# EAGLE board MicroMod_STM32_Processor-Panel (EAGLE 9.6.2), part 1 of 6
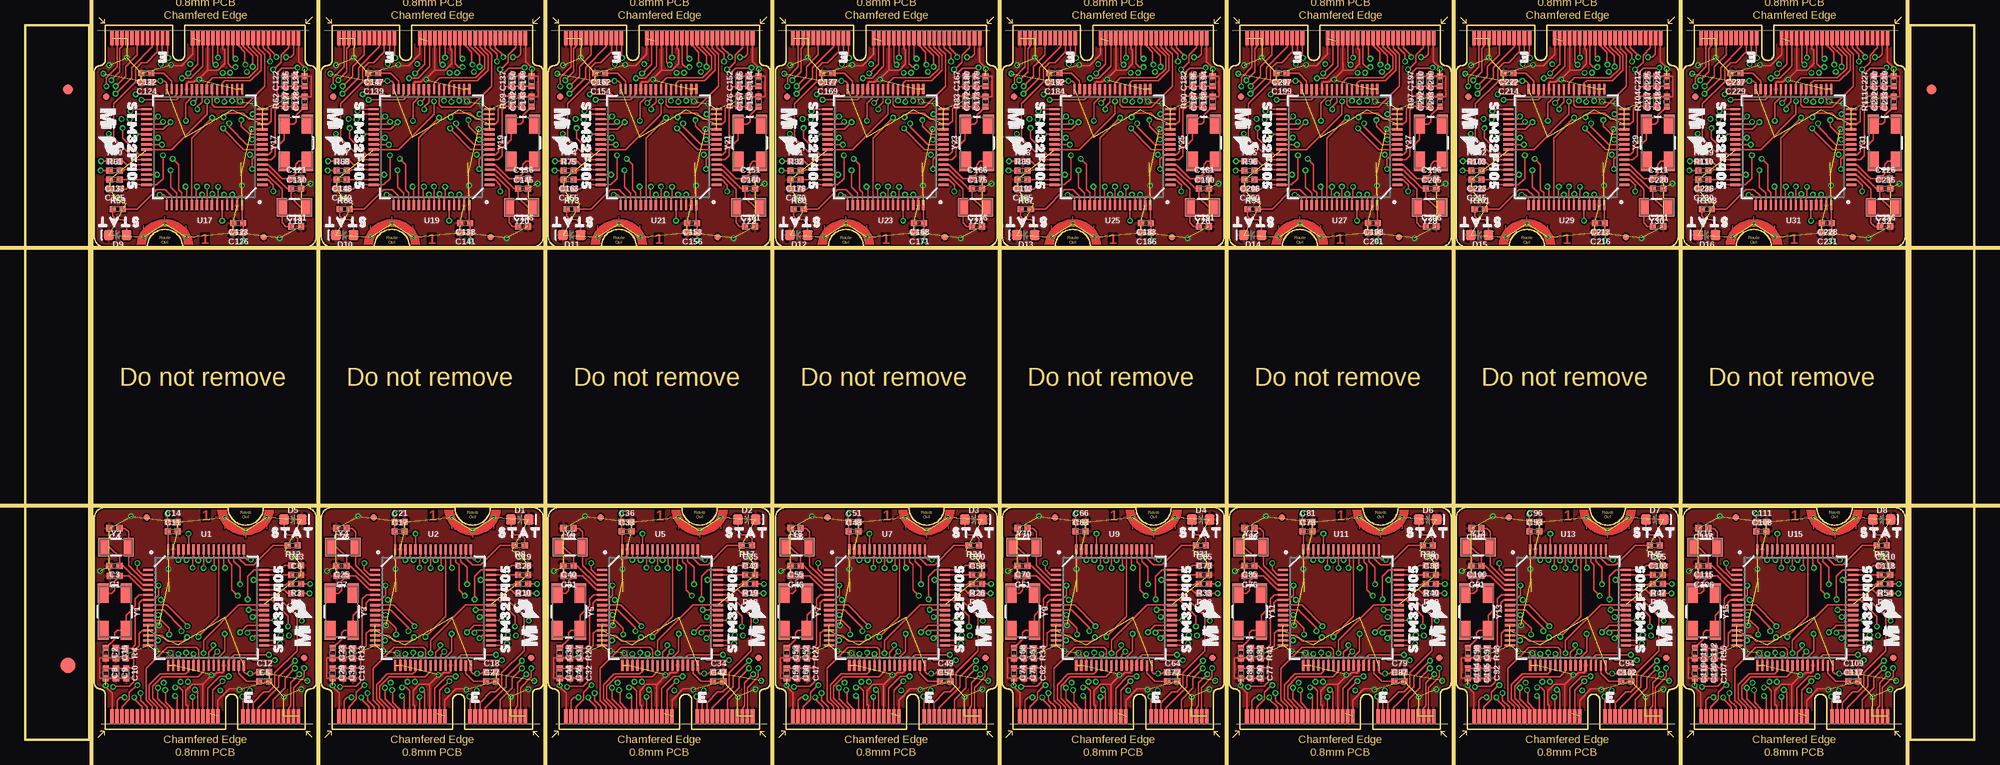
[diagram p0: board, top side]
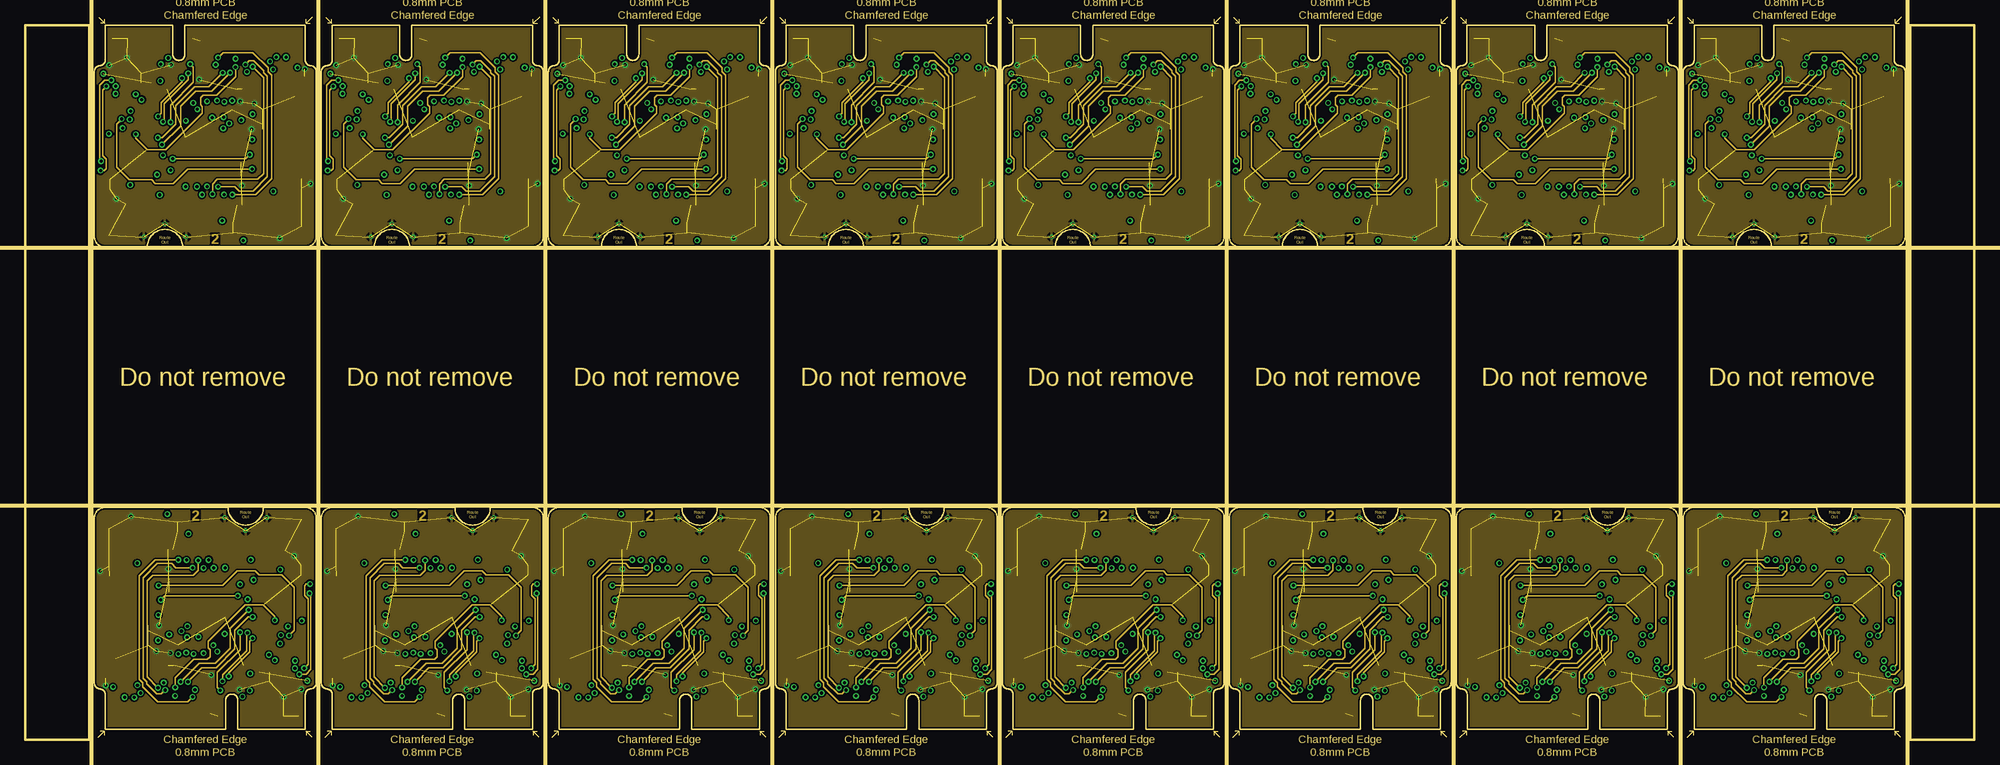
[diagram p1: board, inner layer Route2]
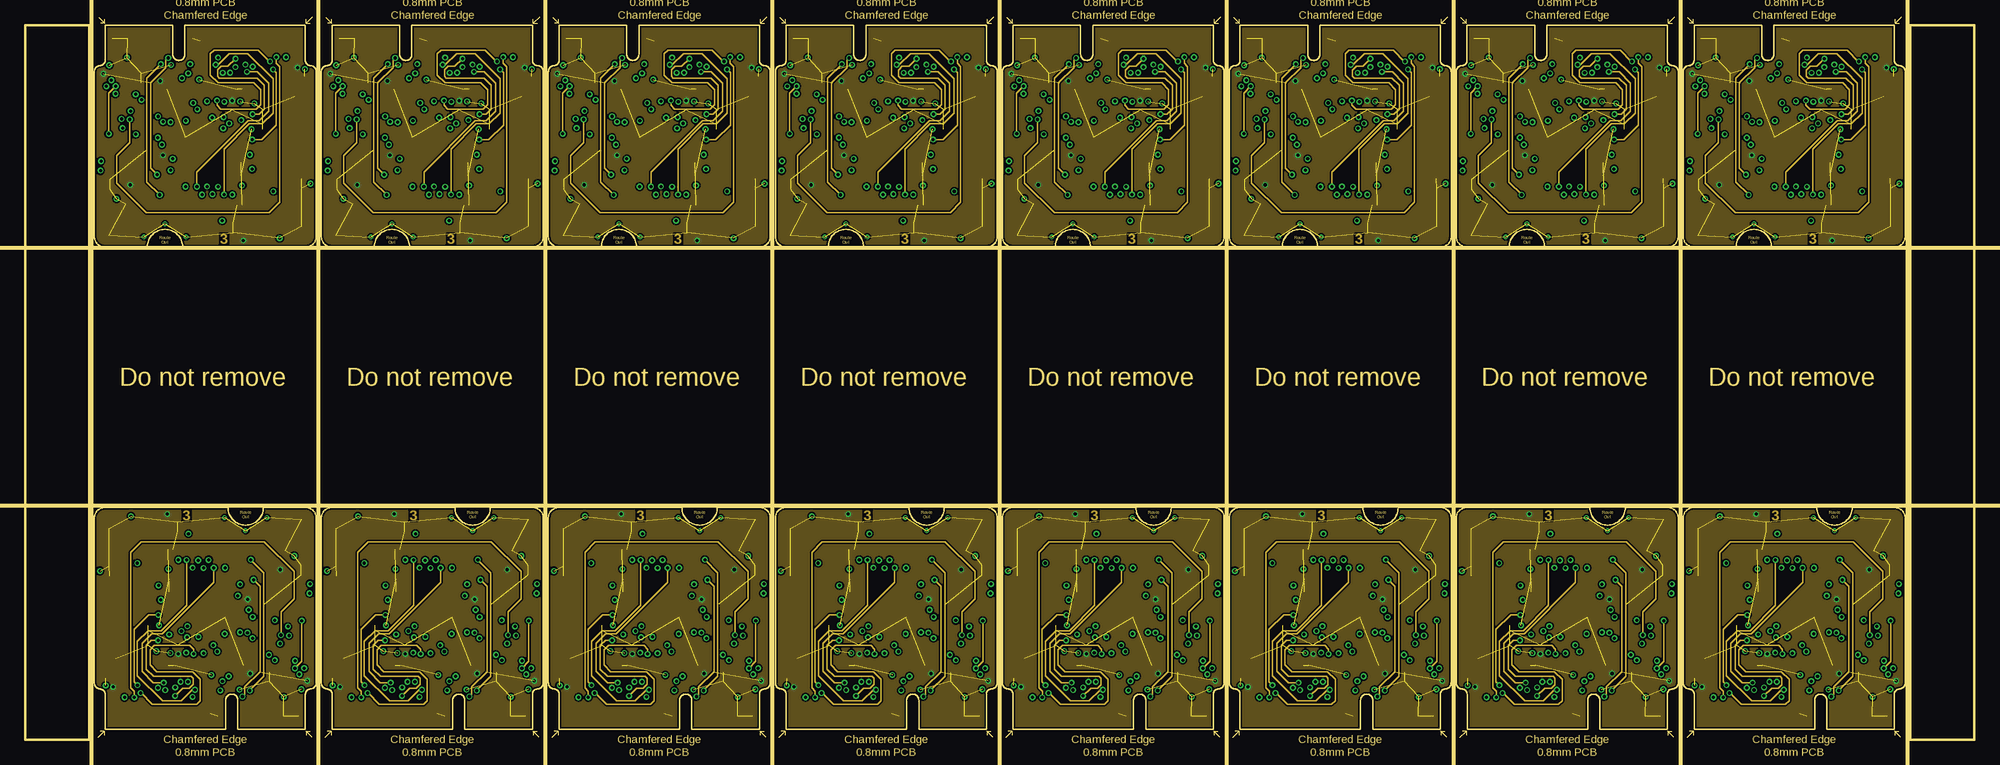
[diagram p2: board, inner layer Route15]
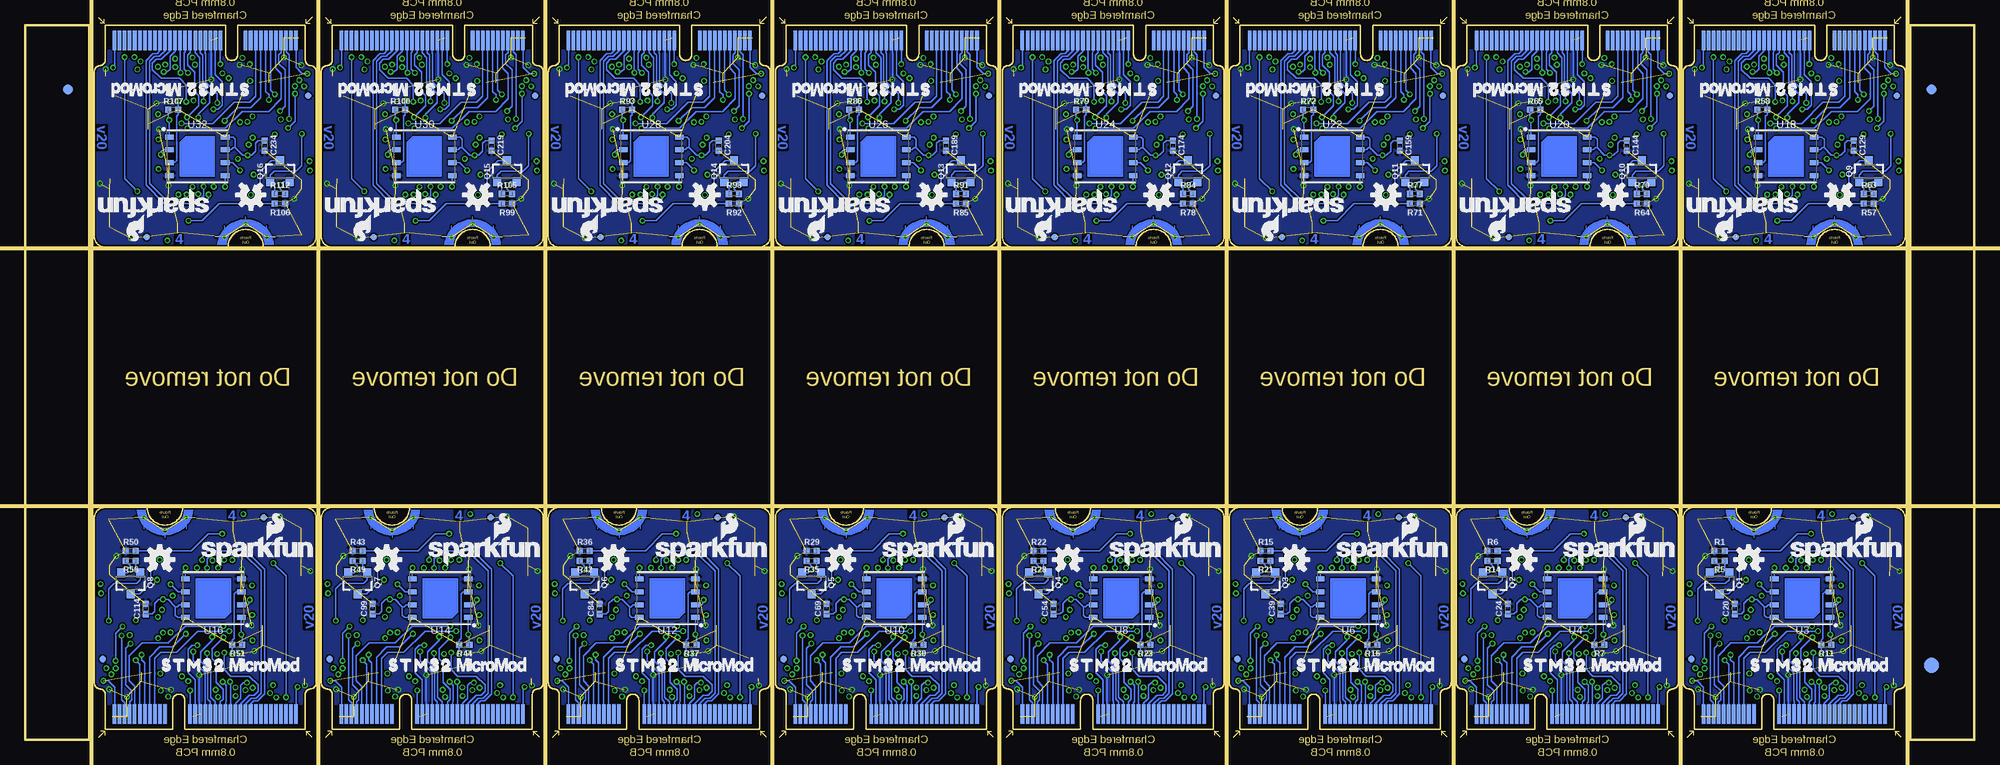
[diagram p3: board, bottom side, seen from below]

Size 193.27 x 70.87 mm. Coordinates in mm from the lower left corner, seen from the top.
Outline: 312 segments
Copper layers (1*2*15*16): Top 0.035559375mm / dielectric 0.47751875mm / Route2 0.035559375mm / dielectric 0.47751875mm / Route15 0.035559375mm / dielectric 0.47751875mm / Bottom 0.035559375mm
Design rules "MicroMod_STM32_Processor": minimum track width 4mil, minimum drill 6mil, track to track 5mil, track to pad 5mil, pad to pad 5mil, via to via 5mil, smd to smd 5mil, copper to edge 4mil, drill to drill 4mil, minimum pad ring 5mil, minimum via ring 5mil, stop-mask expansion 4mil, vias tented up to drill 25mil, thermal gap 10mil
tRestrict: area 11.4,11.3 to 11.6,11.5; area 13.9,7.3 to 14,7.4; area 13.8,8.1 to 13.9,8.5; area 33.9,11.3 to 34.1,11.5; area 36.4,7.3 to 36.5,7.4; area 36.3,8.1 to 36.4,8.5; area 56.4,11.3 to 56.6,11.5; area 58.9,7.3 to 59,7.4; area 58.8,8.1 to 58.9,8.5; area 78.9,11.3 to 79.1,11.5; area 81.4,7.3 to 81.5,7.4; area 81.3,8.1 to 81.4,8.5; 36 more areas
Milling: 11 lines

## Footprints (pad centres in the part's own frame; a part is rotated, then mirrored left to right if it is on the bottom)
0402-TIGHT = smd 0.6 x 0.6: 1 -0.5,0; 2 0.5,0
LED-0603 = smd 1 x 1: A -0.877,0; C 0.877,0
FIDUCIAL-1X2 = smd 1 x 1: 1 0,0
FIDUCIAL-1.5X3 = smd 1.5 x 1.5: 1 0,0
FIDUCIAL-MICRO = smd 0.635 x 0.635: 1 0,0
M.2-CARD-E-22 = smd 0.35 x 1.45: 1 9.25,1.275; 3 8.75,1.275; 5 8.25,1.275; 7 7.75,1.275; 9 7.25,1.275; 11 6.75,1.275; 13 6.25,1.275; 15 5.75,1.275; 17 5.25,1.275; 19 4.75,1.275; 21 4.25,1.275; 23 3.75,1.275; 33 1.25,1.275; 35 0.75,1.275; 37 0.25,1.275; 39 -0.25,1.275; 41 -0.75,1.275; 43 -1.25,1.275; 45 -1.75,1.275; 47 -2.25,1.275; 49 -2.75,1.275; 51 -3.25,1.275; 53 -3.75,1.275; 55 -4.25,1.275; 57 -4.75,1.275; 59 -5.25,1.275; 61 -5.75,1.275; 63 -6.25,1.275; 65 -6.75,1.275; 67 -7.25,1.275; 69 -7.75,1.275; 71 -8.25,1.275; 73 -8.75,1.275; 75 -9.25,1.275 | smd 0.35 x 1.95 bottom: 2 9,1.525; 4 8.5,1.525; 6 8,1.525; 8 7.5,1.525; 10 7,1.525; 12 6.5,1.525; 14 6,1.525; 16 5.5,1.525; 18 5,1.525; 20 4.5,1.525; 22 4,1.525; 32 1.5,1.525; 34 1,1.525; 36 0.5,1.525; 38 0,1.525; 40 -0.5,1.525; 42 -1,1.525; 44 -1.5,1.525; 46 -2,1.525; 48 -2.5,1.525; 50 -3,1.525; 52 -3.5,1.525; 54 -4,1.525; 56 -4.5,1.525; 58 -5,1.525; 60 -5.5,1.525; 62 -6,1.525; 64 -6.5,1.525; 66 -7,1.525; 68 -7.5,1.525; 70 -8,1.525; 72 -8.5,1.525; 74 -9,1.525 | drill 0.2: GND1 1.9,21; GND2 4,19.7; GND3 6.1,21
SOT23-3 = smd 0.8 x 0.9: 1 -0.95,-1; 2 0.95,-1; 3 0,1.1
TQFP64 = smd 0.22 x 1: 1 -3.75,-5.75; 2 -3.25,-5.75; 3 -2.75,-5.75; 4 -2.25,-5.75; 5 -1.75,-5.75; 6 -1.25,-5.75; 7 -0.75,-5.75; 8 -0.25,-5.75; 9 0.25,-5.75; 10 0.75,-5.75; 11 1.25,-5.75; 12 1.75,-5.75; 13 2.25,-5.75; 14 2.75,-5.75; 15 3.25,-5.75; 16 3.75,-5.75; 33 3.75,5.75; 34 3.25,5.75; 35 2.75,5.75; 36 2.25,5.75; 37 1.75,5.75; 38 1.25,5.75; 39 0.75,5.75; 40 0.25,5.75; 41 -0.25,5.75; 42 -0.75,5.75; 43 -1.25,5.75; 44 -1.75,5.75; 45 -2.25,5.75; 46 -2.75,5.75; 47 -3.25,5.75; 48 -3.75,5.75 | smd 1 x 0.22: 17 5.75,-3.75; 18 5.75,-3.25; 19 5.75,-2.75; 20 5.75,-2.25; 21 5.75,-1.75; 22 5.75,-1.25; 23 5.75,-0.75; 24 5.75,-0.25; 25 5.75,0.25; 26 5.75,0.75; 27 5.75,1.25; 28 5.75,1.75; 29 5.75,2.25; 30 5.75,2.75; 31 5.75,3.25; 32 5.75,3.75; 49 -5.75,3.75; 50 -5.75,3.25; 51 -5.75,2.75; 52 -5.75,2.25; 53 -5.75,1.75; 54 -5.75,1.25; 55 -5.75,0.75; 56 -5.75,0.25; 57 -5.75,-0.25; 58 -5.75,-0.75; 59 -5.75,-1.25; 60 -5.75,-1.75; 61 -5.75,-2.25; 62 -5.75,-2.75; 63 -5.75,-3.25; 64 -5.75,-3.75
WSON-8-6X5 = smd 0.85 x 0.5: 1 -2.775,1.905; 2 -2.775,0.635; 3 -2.775,-0.635; 4 -2.775,-1.905; 5 2.775,-1.905; 6 2.775,-0.635; 7 2.775,0.635; 8 2.775,1.905
CRYSTAL-SMD-5X3.2-4PAD = smd 1.9 x 1.1: 1 -1.85,-1.15; 2 1.85,-1.15; 3 1.85,1.15; 4 -1.85,1.15
CRYSTAL-SMD-3.2X1.5MM = smd 1 x 1.8: P$1 -1.25,0; P$2 1.25,0

## Placement (x,y rotation side)
C1  22pF  [0402-TIGHT]  8.86,16.24 180 top
C2  22pF  [0402-TIGHT]  8,8.59 270 top
C3  15pF  [0402-TIGHT]  8.85,17.25 180 top
C4  15pF  [0402-TIGHT]  8.85,20.97 180 top
C5  2.2uF  [0402-TIGHT]  23.71,5.79 0 top
C6  2.2uF  [0402-TIGHT]  26.86,16.35 0 top
C7  22pF  [0402-TIGHT]  31.36,16.24 180 top
C8  0.1uF  [0402-TIGHT]  8,6.58 270 top
C9  1.0uF  [0402-TIGHT]  9,6.58 270 top
C10  4.7uF  [0402-TIGHT]  10,6.57 270 top
C11  0.1uF  [0402-TIGHT]  14.61,20.67 0 top
C12  0.1uF  [0402-TIGHT]  23.71,6.7 0 top
C13  0.1uF  [0402-TIGHT]  26.86,17.27 0 top
C14  0.1uF  [0402-TIGHT]  14.61,21.61 0 top
C15  0.1uF  [0402-TIGHT]  9,8.58 270 top
C16  4.7uF  [0402-TIGHT]  32.5,6.57 270 top
C17  0.1uF  [0402-TIGHT]  37.11,20.67 0 top
C18  0.1uF  [0402-TIGHT]  46.21,6.7 0 top
C19  0.1uF  [0402-TIGHT]  49.36,17.27 0 top
C20  0.1uF  [0402-TIGHT]  23.76,12.95 90 bottom
C21  0.1uF  [0402-TIGHT]  37.11,21.61 0 top
C22  0.1uF  [0402-TIGHT]  31.5,8.58 270 top
C23  22pF  [0402-TIGHT]  30.5,8.59 270 top
C24  0.1uF  [0402-TIGHT]  46.27,12.95 90 bottom
C25  15pF  [0402-TIGHT]  31.35,17.25 180 top
C26  15pF  [0402-TIGHT]  31.35,20.97 180 top
C27  2.2uF  [0402-TIGHT]  46.21,5.79 0 top
C28  2.2uF  [0402-TIGHT]  49.36,16.35 0 top
C29  0.1uF  [0402-TIGHT]  30.5,6.58 270 top
C30  1.0uF  [0402-TIGHT]  31.5,6.58 270 top
C31  22pF  [0402-TIGHT]  53.87,16.24 180 top
C32  4.7uF  [0402-TIGHT]  55.01,6.57 270 top
C33  0.1uF  [0402-TIGHT]  59.62,20.67 0 top
C34  0.1uF  [0402-TIGHT]  68.72,6.7 0 top
C35  0.1uF  [0402-TIGHT]  71.87,17.27 0 top
C36  0.1uF  [0402-TIGHT]  59.62,21.61 0 top
C37  0.1uF  [0402-TIGHT]  54.01,8.58 270 top
C38  22pF  [0402-TIGHT]  53.01,8.59 270 top
C39  0.1uF  [0402-TIGHT]  68.78,12.95 90 bottom
C40  15pF  [0402-TIGHT]  53.86,17.25 180 top
C41  15pF  [0402-TIGHT]  53.86,20.97 180 top
C42  2.2uF  [0402-TIGHT]  68.72,5.79 0 top
C43  2.2uF  [0402-TIGHT]  71.87,16.35 0 top
C44  0.1uF  [0402-TIGHT]  53.01,6.58 270 top
C45  1.0uF  [0402-TIGHT]  54.01,6.58 270 top
C46  22pF  [0402-TIGHT]  76.38,16.24 180 top
C47  4.7uF  [0402-TIGHT]  77.52,6.57 270 top
C48  0.1uF  [0402-TIGHT]  82.13,20.67 0 top
C49  0.1uF  [0402-TIGHT]  91.23,6.7 0 top
C50  0.1uF  [0402-TIGHT]  94.38,17.27 0 top
C51  0.1uF  [0402-TIGHT]  82.13,21.61 0 top
C52  0.1uF  [0402-TIGHT]  76.52,8.58 270 top
C53  22pF  [0402-TIGHT]  75.52,8.59 270 top
C54  0.1uF  [0402-TIGHT]  91.29,12.95 90 bottom
C55  15pF  [0402-TIGHT]  76.37,17.25 180 top
C56  15pF  [0402-TIGHT]  76.37,20.97 180 top
C57  2.2uF  [0402-TIGHT]  91.23,5.79 0 top
C58  2.2uF  [0402-TIGHT]  94.38,16.35 0 top
C59  0.1uF  [0402-TIGHT]  75.52,6.58 270 top
C60  1.0uF  [0402-TIGHT]  76.52,6.58 270 top
C61  22pF  [0402-TIGHT]  98.89,16.24 180 top
C62  4.7uF  [0402-TIGHT]  100.03,6.57 270 top
C63  0.1uF  [0402-TIGHT]  104.64,20.67 0 top
C64  0.1uF  [0402-TIGHT]  113.74,6.7 0 top
C65  0.1uF  [0402-TIGHT]  116.89,17.27 0 top
C66  0.1uF  [0402-TIGHT]  104.64,21.61 0 top
C67  0.1uF  [0402-TIGHT]  99.03,8.58 270 top
C68  22pF  [0402-TIGHT]  98.03,8.59 270 top
C69  0.1uF  [0402-TIGHT]  113.8,12.95 90 bottom
C70  15pF  [0402-TIGHT]  98.88,17.25 180 top
C71  15pF  [0402-TIGHT]  98.88,20.97 180 top
C72  2.2uF  [0402-TIGHT]  113.74,5.79 0 top
C73  2.2uF  [0402-TIGHT]  116.89,16.35 0 top
C74  0.1uF  [0402-TIGHT]  98.03,6.58 270 top
C75  1.0uF  [0402-TIGHT]  99.03,6.58 270 top
C76  22pF  [0402-TIGHT]  121.4,16.24 180 top
C77  4.7uF  [0402-TIGHT]  122.54,6.57 270 top
C78  0.1uF  [0402-TIGHT]  127.15,20.67 0 top
C79  0.1uF  [0402-TIGHT]  136.25,6.7 0 top
C80  0.1uF  [0402-TIGHT]  139.4,17.27 0 top
C81  0.1uF  [0402-TIGHT]  127.15,21.61 0 top
C82  0.1uF  [0402-TIGHT]  121.54,8.58 270 top
C83  22pF  [0402-TIGHT]  120.54,8.59 270 top
C84  0.1uF  [0402-TIGHT]  136.3,12.95 90 bottom
C85  15pF  [0402-TIGHT]  121.39,17.25 180 top
C86  15pF  [0402-TIGHT]  121.39,20.97 180 top
C87  2.2uF  [0402-TIGHT]  136.25,5.79 0 top
C88  2.2uF  [0402-TIGHT]  139.4,16.35 0 top
C89  0.1uF  [0402-TIGHT]  120.54,6.58 270 top
C90  1.0uF  [0402-TIGHT]  121.54,6.58 270 top
C91  22pF  [0402-TIGHT]  143.91,16.24 180 top
C92  4.7uF  [0402-TIGHT]  145.05,6.57 270 top
C93  0.1uF  [0402-TIGHT]  149.66,20.67 0 top
C94  0.1uF  [0402-TIGHT]  158.76,6.7 0 top
C95  0.1uF  [0402-TIGHT]  161.91,17.27 0 top
C96  0.1uF  [0402-TIGHT]  149.66,21.61 0 top
C97  0.1uF  [0402-TIGHT]  144.05,8.58 270 top
C98  22pF  [0402-TIGHT]  143.05,8.59 270 top
C99  0.1uF  [0402-TIGHT]  158.81,12.95 90 bottom
C100  15pF  [0402-TIGHT]  143.9,17.25 180 top
C101  15pF  [0402-TIGHT]  143.9,20.97 180 top
C102  2.2uF  [0402-TIGHT]  158.76,5.79 0 top
C103  2.2uF  [0402-TIGHT]  161.91,16.35 0 top
C104  0.1uF  [0402-TIGHT]  143.05,6.58 270 top
C105  1.0uF  [0402-TIGHT]  144.05,6.58 270 top
C106  22pF  [0402-TIGHT]  166.41,16.24 180 top
C107  4.7uF  [0402-TIGHT]  167.55,6.57 270 top
C108  0.1uF  [0402-TIGHT]  172.16,20.67 0 top
C109  0.1uF  [0402-TIGHT]  181.26,6.7 0 top
C110  0.1uF  [0402-TIGHT]  184.41,17.27 0 top
C111  0.1uF  [0402-TIGHT]  172.16,21.61 0 top
C112  0.1uF  [0402-TIGHT]  166.55,8.58 270 top
C113  22pF  [0402-TIGHT]  165.55,8.59 270 top
C114  0.1uF  [0402-TIGHT]  181.32,12.95 90 bottom
C115  15pF  [0402-TIGHT]  166.4,17.25 180 top
C116  15pF  [0402-TIGHT]  166.4,20.97 180 top
C117  2.2uF  [0402-TIGHT]  181.26,5.79 0 top
C118  2.2uF  [0402-TIGHT]  184.41,16.35 0 top
C119  0.1uF  [0402-TIGHT]  165.55,6.58 270 top
C120  1.0uF  [0402-TIGHT]  166.55,6.58 270 top
C121  22pF  [0402-TIGHT]  26.86,55.65 0 top
C122  4.7uF  [0402-TIGHT]  25.72,65.32 90 top
C123  0.1uF  [0402-TIGHT]  21.11,51.22 180 top
C124  0.1uF  [0402-TIGHT]  12.01,65.19 180 top
C125  0.1uF  [0402-TIGHT]  8.86,54.62 180 top
C126  0.1uF  [0402-TIGHT]  21.11,50.28 180 top
C127  0.1uF  [0402-TIGHT]  26.72,63.31 90 top
C128  22pF  [0402-TIGHT]  27.72,63.3 90 top
C129  0.1uF  [0402-TIGHT]  11.95,58.93 270 bottom
C130  15pF  [0402-TIGHT]  26.87,54.64 0 top
C131  15pF  [0402-TIGHT]  26.87,50.91 0 top
C132  2.2uF  [0402-TIGHT]  12.01,66.1 180 top
C133  2.2uF  [0402-TIGHT]  8.86,55.54 180 top
C134  0.1uF  [0402-TIGHT]  27.72,65.31 90 top
C135  1.0uF  [0402-TIGHT]  26.72,65.31 90 top
C136  22pF  [0402-TIGHT]  49.37,55.65 0 top
C137  4.7uF  [0402-TIGHT]  48.23,65.32 90 top
C138  0.1uF  [0402-TIGHT]  43.62,51.22 180 top
C139  0.1uF  [0402-TIGHT]  34.52,65.19 180 top
C140  0.1uF  [0402-TIGHT]  31.37,54.62 180 top
C141  0.1uF  [0402-TIGHT]  43.62,50.28 180 top
C142  0.1uF  [0402-TIGHT]  49.23,63.31 90 top
C143  22pF  [0402-TIGHT]  50.23,63.3 90 top
C144  0.1uF  [0402-TIGHT]  34.46,58.93 270 bottom
C145  15pF  [0402-TIGHT]  49.38,54.64 0 top
C146  15pF  [0402-TIGHT]  49.38,50.91 0 top
C147  2.2uF  [0402-TIGHT]  34.52,66.1 180 top
C148  2.2uF  [0402-TIGHT]  31.37,55.54 180 top
C149  0.1uF  [0402-TIGHT]  50.23,65.31 90 top
C150  1.0uF  [0402-TIGHT]  49.23,65.31 90 top
C151  22pF  [0402-TIGHT]  71.87,55.65 0 top
C152  4.7uF  [0402-TIGHT]  70.73,65.32 90 top
C153  0.1uF  [0402-TIGHT]  66.12,51.22 180 top
C154  0.1uF  [0402-TIGHT]  57.02,65.19 180 top
C155  0.1uF  [0402-TIGHT]  53.87,54.62 180 top
C156  0.1uF  [0402-TIGHT]  66.12,50.28 180 top
C157  0.1uF  [0402-TIGHT]  71.73,63.31 90 top
C158  22pF  [0402-TIGHT]  72.73,63.3 90 top
C159  0.1uF  [0402-TIGHT]  56.97,58.93 270 bottom
C160  15pF  [0402-TIGHT]  71.88,54.64 0 top
C161  15pF  [0402-TIGHT]  71.88,50.91 0 top
C162  2.2uF  [0402-TIGHT]  57.02,66.1 180 top
C163  2.2uF  [0402-TIGHT]  53.87,55.54 180 top
C164  0.1uF  [0402-TIGHT]  72.73,65.31 90 top
C165  1.0uF  [0402-TIGHT]  71.73,65.31 90 top
C166  22pF  [0402-TIGHT]  94.38,55.65 0 top
C167  4.7uF  [0402-TIGHT]  93.24,65.32 90 top
C168  0.1uF  [0402-TIGHT]  88.63,51.22 180 top
C169  0.1uF  [0402-TIGHT]  79.53,65.19 180 top
C170  0.1uF  [0402-TIGHT]  76.38,54.62 180 top
C171  0.1uF  [0402-TIGHT]  88.63,50.28 180 top
C172  0.1uF  [0402-TIGHT]  94.24,63.31 90 top
C173  22pF  [0402-TIGHT]  95.24,63.3 90 top
C174  0.1uF  [0402-TIGHT]  79.48,58.93 270 bottom
C175  15pF  [0402-TIGHT]  94.39,54.64 0 top
C176  15pF  [0402-TIGHT]  94.39,50.91 0 top
C177  2.2uF  [0402-TIGHT]  79.53,66.1 180 top
C178  2.2uF  [0402-TIGHT]  76.38,55.54 180 top
C179  0.1uF  [0402-TIGHT]  95.24,65.31 90 top
C180  1.0uF  [0402-TIGHT]  94.24,65.31 90 top
C181  22pF  [0402-TIGHT]  116.89,55.65 0 top
C182  4.7uF  [0402-TIGHT]  115.75,65.32 90 top
C183  0.1uF  [0402-TIGHT]  111.14,51.22 180 top
C184  0.1uF  [0402-TIGHT]  102.04,65.19 180 top
C185  0.1uF  [0402-TIGHT]  98.89,54.62 180 top
C186  0.1uF  [0402-TIGHT]  111.14,50.28 180 top
C187  0.1uF  [0402-TIGHT]  116.75,63.31 90 top
C188  22pF  [0402-TIGHT]  117.75,63.3 90 top
C189  0.1uF  [0402-TIGHT]  101.98,58.93 270 bottom
C190  15pF  [0402-TIGHT]  116.9,54.64 0 top
C191  15pF  [0402-TIGHT]  116.9,50.91 0 top
C192  2.2uF  [0402-TIGHT]  102.04,66.1 180 top
C193  2.2uF  [0402-TIGHT]  98.89,55.54 180 top
C194  0.1uF  [0402-TIGHT]  117.75,65.31 90 top
C195  1.0uF  [0402-TIGHT]  116.75,65.31 90 top
C196  22pF  [0402-TIGHT]  139.4,55.65 0 top
C197  4.7uF  [0402-TIGHT]  138.26,65.32 90 top
C198  0.1uF  [0402-TIGHT]  133.65,51.22 180 top
C199  0.1uF  [0402-TIGHT]  124.55,65.19 180 top
C200  0.1uF  [0402-TIGHT]  121.4,54.62 180 top
C201  0.1uF  [0402-TIGHT]  133.65,50.28 180 top
C202  0.1uF  [0402-TIGHT]  139.26,63.31 90 top
C203  22pF  [0402-TIGHT]  140.26,63.3 90 top
C204  0.1uF  [0402-TIGHT]  124.49,58.93 270 bottom
C205  15pF  [0402-TIGHT]  139.41,54.64 0 top
C206  15pF  [0402-TIGHT]  139.41,50.91 0 top
C207  2.2uF  [0402-TIGHT]  124.55,66.1 180 top
C208  2.2uF  [0402-TIGHT]  121.4,55.54 180 top
C209  0.1uF  [0402-TIGHT]  140.26,65.31 90 top
C210  1.0uF  [0402-TIGHT]  139.26,65.31 90 top
C211  22pF  [0402-TIGHT]  161.91,55.65 0 top
C212  4.7uF  [0402-TIGHT]  160.77,65.32 90 top
C213  0.1uF  [0402-TIGHT]  156.16,51.22 180 top
C214  0.1uF  [0402-TIGHT]  147.06,65.19 180 top
C215  0.1uF  [0402-TIGHT]  143.91,54.62 180 top
C216  0.1uF  [0402-TIGHT]  156.16,50.28 180 top
C217  0.1uF  [0402-TIGHT]  161.77,63.31 90 top
C218  22pF  [0402-TIGHT]  162.77,63.3 90 top
C219  0.1uF  [0402-TIGHT]  147,58.93 270 bottom
C220  15pF  [0402-TIGHT]  161.92,54.64 0 top
C221  15pF  [0402-TIGHT]  161.92,50.91 0 top
C222  2.2uF  [0402-TIGHT]  147.06,66.1 180 top
C223  2.2uF  [0402-TIGHT]  143.91,55.54 180 top
C224  0.1uF  [0402-TIGHT]  162.77,65.31 90 top
C225  1.0uF  [0402-TIGHT]  161.77,65.31 90 top
C226  22pF  [0402-TIGHT]  184.41,55.65 0 top
C227  4.7uF  [0402-TIGHT]  183.27,65.32 90 top
C228  0.1uF  [0402-TIGHT]  178.66,51.22 180 top
C229  0.1uF  [0402-TIGHT]  169.56,65.19 180 top
C230  0.1uF  [0402-TIGHT]  166.41,54.62 180 top
C231  0.1uF  [0402-TIGHT]  178.66,50.28 180 top
C232  0.1uF  [0402-TIGHT]  184.27,63.31 90 top
C233  22pF  [0402-TIGHT]  185.27,63.3 90 top
C234  0.1uF  [0402-TIGHT]  169.51,58.93 270 bottom
C235  15pF  [0402-TIGHT]  184.42,54.64 0 top
C236  15pF  [0402-TIGHT]  184.42,50.91 0 top
C237  2.2uF  [0402-TIGHT]  169.56,66.1 180 top
C238  2.2uF  [0402-TIGHT]  166.41,55.54 180 top
C239  0.1uF  [0402-TIGHT]  185.27,65.31 90 top
C240  1.0uF  [0402-TIGHT]  184.27,65.31 90 top
D1  BLUE  [LED-0603]  49.04,21.83 0 top
D2  BLUE  [LED-0603]  71.55,21.83 0 top
D3  BLUE  [LED-0603]  94.06,21.83 0 top
D4  BLUE  [LED-0603]  116.57,21.83 0 top
D5  BLUE  [LED-0603]  26.54,21.83 0 top
D6  BLUE  [LED-0603]  139.08,21.83 0 top
D7  BLUE  [LED-0603]  161.59,21.83 0 top
D8  BLUE  [LED-0603]  184.09,21.83 0 top
D9  BLUE  [LED-0603]  9.18,50.06 180 top
D10  BLUE  [LED-0603]  31.69,50.06 180 top
D11  BLUE  [LED-0603]  54.19,50.06 180 top
D12  BLUE  [LED-0603]  76.7,50.06 180 top
D13  BLUE  [LED-0603]  99.21,50.06 180 top
D14  BLUE  [LED-0603]  121.72,50.06 180 top
D15  BLUE  [LED-0603]  144.23,50.06 180 top
D16  BLUE  [LED-0603]  166.73,50.06 180 top
E$1  [FIDUCIAL-1X2]  4.23,64.52 0 top
E$2  [FIDUCIAL-1X2]  4.23,64.52 0 bottom
E$3  [FIDUCIAL-1X2]  189.04,64.52 0 top
E$4  [FIDUCIAL-1X2]  189.04,64.52 0 bottom
E$5  [FIDUCIAL-1.5X3]  4.23,7.37 0 top
E$6  [FIDUCIAL-1.5X3]  4.23,7.37 0 bottom
FD1  FIDUCIALUFIDUCIAL  [FIDUCIAL-MICRO]  27.68,8.09 0 top
FD2  FIDUCIALUFIDUCIAL  [FIDUCIAL-MICRO]  12.06,22.06 0 bottom
FD3  FIDUCIALUFIDUCIAL  [FIDUCIAL-MICRO]  28.04,7.99 0 bottom
FD4  FIDUCIALUFIDUCIAL  [FIDUCIAL-MICRO]  12.06,22.06 0 top
FD5  FIDUCIALUFIDUCIAL  [FIDUCIAL-MICRO]  50.19,8.09 0 top
FD6  FIDUCIALUFIDUCIAL  [FIDUCIAL-MICRO]  34.56,22.06 0 bottom
FD7  FIDUCIALUFIDUCIAL  [FIDUCIAL-MICRO]  50.54,7.99 0 bottom
FD8  FIDUCIALUFIDUCIAL  [FIDUCIAL-MICRO]  34.56,22.06 0 top
FD9  FIDUCIALUFIDUCIAL  [FIDUCIAL-MICRO]  72.7,8.09 0 top
FD10  FIDUCIALUFIDUCIAL  [FIDUCIAL-MICRO]  57.07,22.06 0 bottom
FD11  FIDUCIALUFIDUCIAL  [FIDUCIAL-MICRO]  73.05,7.99 0 bottom
FD12  FIDUCIALUFIDUCIAL  [FIDUCIAL-MICRO]  57.07,22.06 0 top
FD13  FIDUCIALUFIDUCIAL  [FIDUCIAL-MICRO]  95.21,8.09 0 top
FD14  FIDUCIALUFIDUCIAL  [FIDUCIAL-MICRO]  79.58,22.06 0 bottom
FD15  FIDUCIALUFIDUCIAL  [FIDUCIAL-MICRO]  95.56,7.99 0 bottom
FD16  FIDUCIALUFIDUCIAL  [FIDUCIAL-MICRO]  79.58,22.06 0 top
FD17  FIDUCIALUFIDUCIAL  [FIDUCIAL-MICRO]  117.72,8.09 0 top
FD18  FIDUCIALUFIDUCIAL  [FIDUCIAL-MICRO]  102.09,22.06 0 bottom
FD19  FIDUCIALUFIDUCIAL  [FIDUCIAL-MICRO]  118.07,7.99 0 bottom
FD20  FIDUCIALUFIDUCIAL  [FIDUCIAL-MICRO]  102.09,22.06 0 top
FD21  FIDUCIALUFIDUCIAL  [FIDUCIAL-MICRO]  140.22,8.09 0 top
FD22  FIDUCIALUFIDUCIAL  [FIDUCIAL-MICRO]  124.6,22.06 0 bottom
FD23  FIDUCIALUFIDUCIAL  [FIDUCIAL-MICRO]  140.58,7.99 0 bottom
FD24  FIDUCIALUFIDUCIAL  [FIDUCIAL-MICRO]  124.6,22.06 0 top
FD25  FIDUCIALUFIDUCIAL  [FIDUCIAL-MICRO]  162.73,8.09 0 top
FD26  FIDUCIALUFIDUCIAL  [FIDUCIAL-MICRO]  147.11,22.06 0 bottom
FD27  FIDUCIALUFIDUCIAL  [FIDUCIAL-MICRO]  163.09,7.99 0 bottom
FD28  FIDUCIALUFIDUCIAL  [FIDUCIAL-MICRO]  147.11,22.06 0 top
FD29  FIDUCIALUFIDUCIAL  [FIDUCIAL-MICRO]  185.24,8.09 0 top
FD30  FIDUCIALUFIDUCIAL  [FIDUCIAL-MICRO]  169.61,22.06 0 bottom
FD31  FIDUCIALUFIDUCIAL  [FIDUCIAL-MICRO]  185.59,7.99 0 bottom
FD32  FIDUCIALUFIDUCIAL  [FIDUCIAL-MICRO]  169.61,22.06 0 top
FD33  FIDUCIALUFIDUCIAL  [FIDUCIAL-MICRO]  8.03,63.79 180 top
FD34  FIDUCIALUFIDUCIAL  [FIDUCIAL-MICRO]  23.66,49.83 180 bottom
FD35  FIDUCIALUFIDUCIAL  [FIDUCIAL-MICRO]  7.68,63.9 180 bottom
FD36  FIDUCIALUFIDUCIAL  [FIDUCIAL-MICRO]  23.66,49.83 180 top
FD37  FIDUCIALUFIDUCIAL  [FIDUCIAL-MICRO]  30.54,63.79 180 top
FD38  FIDUCIALUFIDUCIAL  [FIDUCIAL-MICRO]  46.17,49.83 180 bottom
FD39  FIDUCIALUFIDUCIAL  [FIDUCIAL-MICRO]  30.19,63.9 180 bottom
FD40  FIDUCIALUFIDUCIAL  [FIDUCIAL-MICRO]  46.17,49.83 180 top
FD41  FIDUCIALUFIDUCIAL  [FIDUCIAL-MICRO]  53.05,63.79 180 top
FD42  FIDUCIALUFIDUCIAL  [FIDUCIAL-MICRO]  68.67,49.83 180 bottom
FD43  FIDUCIALUFIDUCIAL  [FIDUCIAL-MICRO]  52.69,63.9 180 bottom
FD44  FIDUCIALUFIDUCIAL  [FIDUCIAL-MICRO]  68.67,49.83 180 top
FD45  FIDUCIALUFIDUCIAL  [FIDUCIAL-MICRO]  75.56,63.79 180 top
FD46  FIDUCIALUFIDUCIAL  [FIDUCIAL-MICRO]  91.18,49.83 180 bottom
FD47  FIDUCIALUFIDUCIAL  [FIDUCIAL-MICRO]  75.2,63.9 180 bottom
FD48  FIDUCIALUFIDUCIAL  [FIDUCIAL-MICRO]  91.18,49.83 180 top
FD49  FIDUCIALUFIDUCIAL  [FIDUCIAL-MICRO]  98.06,63.79 180 top
FD50  FIDUCIALUFIDUCIAL  [FIDUCIAL-MICRO]  113.69,49.83 180 bottom
FD51  FIDUCIALUFIDUCIAL  [FIDUCIAL-MICRO]  97.71,63.9 180 bottom
FD52  FIDUCIALUFIDUCIAL  [FIDUCIAL-MICRO]  113.69,49.83 180 top
FD53  FIDUCIALUFIDUCIAL  [FIDUCIAL-MICRO]  120.57,63.79 180 top
FD54  FIDUCIALUFIDUCIAL  [FIDUCIAL-MICRO]  136.2,49.83 180 bottom
FD55  FIDUCIALUFIDUCIAL  [FIDUCIAL-MICRO]  120.22,63.9 180 bottom
FD56  FIDUCIALUFIDUCIAL  [FIDUCIAL-MICRO]  136.2,49.83 180 top
FD57  FIDUCIALUFIDUCIAL  [FIDUCIAL-MICRO]  143.08,63.79 180 top
FD58  FIDUCIALUFIDUCIAL  [FIDUCIAL-MICRO]  158.71,49.83 180 bottom
FD59  FIDUCIALUFIDUCIAL  [FIDUCIAL-MICRO]  142.73,63.9 180 bottom
FD60  FIDUCIALUFIDUCIAL  [FIDUCIAL-MICRO]  158.71,49.83 180 top
FD61  FIDUCIALUFIDUCIAL  [FIDUCIAL-MICRO]  165.59,63.79 180 top
FD62  FIDUCIALUFIDUCIAL  [FIDUCIAL-MICRO]  181.21,49.83 180 bottom
FD63  FIDUCIALUFIDUCIAL  [FIDUCIAL-MICRO]  165.23,63.9 180 bottom
FD64  FIDUCIALUFIDUCIAL  [FIDUCIAL-MICRO]  181.21,49.83 180 top
J1  MICROMOD-2222  [M.2-CARD-E-22]  17.86,1.02 0 top
J2  MICROMOD-2222  [M.2-CARD-E-22]  40.36,1.02 0 top
J3  MICROMOD-2222  [M.2-CARD-E-22]  62.87,1.02 0 top
J4  MICROMOD-2222  [M.2-CARD-E-22]  85.38,1.02 0 top
J5  MICROMOD-2222  [M.2-CARD-E-22]  107.89,1.02 0 top
J6  MICROMOD-2222  [M.2-CARD-E-22]  130.4,1.02 0 top
J7  MICROMOD-2222  [M.2-CARD-E-22]  152.91,1.02 0 top
J8  MICROMOD-2222  [M.2-CARD-E-22]  175.41,1.02 0 top
J9  MICROMOD-2222  [M.2-CARD-E-22]  17.86,70.87 180 top
J10  MICROMOD-2222  [M.2-CARD-E-22]  40.37,70.87 180 top
J11  MICROMOD-2222  [M.2-CARD-E-22]  62.87,70.87 180 top
J12  MICROMOD-2222  [M.2-CARD-E-22]  85.38,70.87 180 top
J13  MICROMOD-2222  [M.2-CARD-E-22]  107.89,70.87 180 top
J14  MICROMOD-2222  [M.2-CARD-E-22]  130.4,70.87 180 top
J15  MICROMOD-2222  [M.2-CARD-E-22]  152.91,70.87 180 top
J16  MICROMOD-2222  [M.2-CARD-E-22]  175.41,70.87 180 top
LOGO1  OSHW-LOGOS  [OSHW-LOGO-S]  44.88,17.85 0 bottom
LOGO2  OSHW-LOGOS  [OSHW-LOGO-S]  22.38,17.85 0 bottom
LOGO3  SFE_LOGO_NAME_FLAME.1_INCH  [SFE_LOGO_NAME_FLAME_.1]  12.64,18.73 0 bottom
LOGO4  SFE_LOGO_NAME_FLAME.1_INCH  [SFE_LOGO_NAME_FLAME_.1]  35.14,18.73 0 bottom
LOGO5  OSHW-LOGOS  [OSHW-LOGO-S]  67.39,17.85 0 bottom
LOGO6  SFE_LOGO_NAME_FLAME.1_INCH  [SFE_LOGO_NAME_FLAME_.1]  57.65,18.73 0 bottom
LOGO7  OSHW-LOGOS  [OSHW-LOGO-S]  89.9,17.85 0 bottom
LOGO8  SFE_LOGO_NAME_FLAME.1_INCH  [SFE_LOGO_NAME_FLAME_.1]  80.16,18.73 0 bottom
LOGO9  OSHW-LOGOS  [OSHW-LOGO-S]  112.41,17.85 0 bottom
LOGO10  SFE_LOGO_NAME_FLAME.1_INCH  [SFE_LOGO_NAME_FLAME_.1]  102.67,18.73 0 bottom
LOGO11  OSHW-LOGOS  [OSHW-LOGO-S]  134.92,17.85 0 bottom
LOGO12  SFE_LOGO_NAME_FLAME.1_INCH  [SFE_LOGO_NAME_FLAME_.1]  125.18,18.73 0 bottom
LOGO13  OSHW-LOGOS  [OSHW-LOGO-S]  157.43,17.85 0 bottom
LOGO14  SFE_LOGO_NAME_FLAME.1_INCH  [SFE_LOGO_NAME_FLAME_.1]  147.69,18.73 0 bottom
LOGO15  OSHW-LOGOS  [OSHW-LOGO-S]  179.93,17.85 0 bottom
LOGO16  SFE_LOGO_NAME_FLAME.1_INCH  [SFE_LOGO_NAME_FLAME_.1]  170.19,18.73 0 bottom
LOGO17  OSHW-LOGOS  [OSHW-LOGO-S]  13.34,54.04 180 bottom
LOGO18  SFE_LOGO_NAME_FLAME.1_INCH  [SFE_LOGO_NAME_FLAME_.1]  23.08,53.16 180 bottom
LOGO19  OSHW-LOGOS  [OSHW-LOGO-S]  35.85,54.04 180 bottom
LOGO20  SFE_LOGO_NAME_FLAME.1_INCH  [SFE_LOGO_NAME_FLAME_.1]  45.59,53.16 180 bottom
LOGO21  OSHW-LOGOS  [OSHW-LOGO-S]  58.35,54.04 180 bottom
LOGO22  SFE_LOGO_NAME_FLAME.1_INCH  [SFE_LOGO_NAME_FLAME_.1]  68.09,53.16 180 bottom
LOGO23  OSHW-LOGOS  [OSHW-LOGO-S]  80.86,54.04 180 bottom
LOGO24  SFE_LOGO_NAME_FLAME.1_INCH  [SFE_LOGO_NAME_FLAME_.1]  90.6,53.16 180 bottom
LOGO25  OSHW-LOGOS  [OSHW-LOGO-S]  103.37,54.04 180 bottom
LOGO26  SFE_LOGO_NAME_FLAME.1_INCH  [SFE_LOGO_NAME_FLAME_.1]  113.11,53.16 180 bottom
LOGO27  OSHW-LOGOS  [OSHW-LOGO-S]  125.88,54.04 180 bottom
LOGO28  SFE_LOGO_NAME_FLAME.1_INCH  [SFE_LOGO_NAME_FLAME_.1]  135.62,53.16 180 bottom
LOGO29  OSHW-LOGOS  [OSHW-LOGO-S]  148.39,54.04 180 bottom
LOGO30  SFE_LOGO_NAME_FLAME.1_INCH  [SFE_LOGO_NAME_FLAME_.1]  158.13,53.16 180 bottom
LOGO31  OSHW-LOGOS  [OSHW-LOGO-S]  170.89,54.04 180 bottom
LOGO32  SFE_LOGO_NAME_FLAME.1_INCH  [SFE_LOGO_NAME_FLAME_.1]  180.63,53.16 180 bottom
Q1  [SOT23-3]  25.26,15.55 180 bottom
Q2  [SOT23-3]  47.76,15.55 180 bottom
Q3  [SOT23-3]  70.27,15.55 180 bottom
Q4  [SOT23-3]  92.78,15.55 180 bottom
Q5  [SOT23-3]  115.29,15.55 180 bottom
Q6  [SOT23-3]  137.8,15.55 180 bottom
Q7  [SOT23-3]  160.31,15.55 180 bottom
Q8  [SOT23-3]  182.81,15.55 180 bottom
Q9  [SOT23-3]  10.46,56.34 0 bottom
Q10  [SOT23-3]  32.97,56.34 0 bottom
Q11  [SOT23-3]  55.47,56.34 0 bottom
Q12  [SOT23-3]  77.98,56.34 0 bottom
Q13  [SOT23-3]  100.49,56.34 0 bottom
Q14  [SOT23-3]  123,56.34 0 bottom
Q15  [SOT23-3]  145.51,56.34 0 bottom
Q16  [SOT23-3]  168.01,56.34 0 bottom
R1  100k  [0402-TIGHT]  25.26,18.74 0 bottom
R2  22  [0402-TIGHT]  26.86,14.51 180 top
R3  22  [0402-TIGHT]  26.86,15.43 180 top
R4  5.1k  [0402-TIGHT]  9.99,8.57 270 top
R5  100k  [0402-TIGHT]  25.26,17.75 180 bottom
R6  100k  [0402-TIGHT]  47.76,18.74 0 bottom
R7  100k  [0402-TIGHT]  37.18,9.42 180 bottom
R8  1k  [0402-TIGHT]  49.04,19.27 180 top
R9  22  [0402-TIGHT]  49.36,14.51 180 top
R10  22  [0402-TIGHT]  49.36,15.43 180 top
R11  100k  [0402-TIGHT]  14.68,9.42 180 bottom
R12  1k  [0402-TIGHT]  26.54,19.27 180 top
R13  5.1k  [0402-TIGHT]  32.49,8.57 270 top
R14  100k  [0402-TIGHT]  47.76,17.75 180 bottom
R15  100k  [0402-TIGHT]  70.27,18.74 0 bottom
R16  100k  [0402-TIGHT]  59.69,9.42 180 bottom
R17  1k  [0402-TIGHT]  71.55,19.27 180 top
R18  22  [0402-TIGHT]  71.87,14.51 180 top
R19  22  [0402-TIGHT]  71.87,15.43 180 top
R20  5.1k  [0402-TIGHT]  55,8.57 270 top
R21  100k  [0402-TIGHT]  70.27,17.75 180 bottom
R22  100k  [0402-TIGHT]  92.78,18.74 0 bottom
R23  100k  [0402-TIGHT]  82.2,9.42 180 bottom
R24  1k  [0402-TIGHT]  94.06,19.27 180 top
R25  22  [0402-TIGHT]  94.38,14.51 180 top
R26  22  [0402-TIGHT]  94.38,15.43 180 top
R27  5.1k  [0402-TIGHT]  77.51,8.57 270 top
R28  100k  [0402-TIGHT]  92.78,17.75 180 bottom
R29  100k  [0402-TIGHT]  115.29,18.74 0 bottom
R30  100k  [0402-TIGHT]  104.71,9.42 180 bottom
R31  1k  [0402-TIGHT]  116.57,19.27 180 top
R32  22  [0402-TIGHT]  116.89,14.51 180 top
R33  22  [0402-TIGHT]  116.89,15.43 180 top
R34  5.1k  [0402-TIGHT]  100.02,8.57 270 top
R35  100k  [0402-TIGHT]  115.29,17.75 180 bottom
R36  100k  [0402-TIGHT]  137.8,18.74 0 bottom
R37  100k  [0402-TIGHT]  127.22,9.42 180 bottom
R38  1k  [0402-TIGHT]  139.08,19.27 180 top
R39  22  [0402-TIGHT]  139.4,14.51 180 top
R40  22  [0402-TIGHT]  139.4,15.43 180 top
R41  5.1k  [0402-TIGHT]  122.53,8.57 270 top
R42  100k  [0402-TIGHT]  137.8,17.75 180 bottom
R43  100k  [0402-TIGHT]  160.31,18.74 0 bottom
R44  100k  [0402-TIGHT]  149.73,9.42 180 bottom
R45  1k  [0402-TIGHT]  161.59,19.27 180 top
R46  22  [0402-TIGHT]  161.91,14.51 180 top
R47  22  [0402-TIGHT]  161.91,15.43 180 top
R48  5.1k  [0402-TIGHT]  145.04,8.57 270 top
R49  100k  [0402-TIGHT]  160.31,17.75 180 bottom
R50  100k  [0402-TIGHT]  182.81,18.74 0 bottom
R51  100k  [0402-TIGHT]  172.23,9.42 180 bottom
R52  1k  [0402-TIGHT]  184.09,19.27 180 top
R53  22  [0402-TIGHT]  184.41,14.51 180 top
R54  22  [0402-TIGHT]  184.41,15.43 180 top
R55  5.1k  [0402-TIGHT]  167.54,8.57 270 top
R56  100k  [0402-TIGHT]  182.81,17.75 180 bottom
R57  100k  [0402-TIGHT]  10.46,53.15 180 bottom
R58  100k  [0402-TIGHT]  21.04,62.47 0 bottom
R59  1k  [0402-TIGHT]  9.18,52.62 0 top
R60  22  [0402-TIGHT]  8.86,57.38 0 top
R61  22  [0402-TIGHT]  8.86,56.46 0 top
R62  5.1k  [0402-TIGHT]  25.73,63.32 90 top
R63  100k  [0402-TIGHT]  10.46,54.14 0 bottom
R64  100k  [0402-TIGHT]  32.97,53.15 180 bottom
R65  100k  [0402-TIGHT]  43.55,62.47 0 bottom
R66  1k  [0402-TIGHT]  31.69,52.62 0 top
R67  22  [0402-TIGHT]  31.37,57.38 0 top
R68  22  [0402-TIGHT]  31.37,56.46 0 top
R69  5.1k  [0402-TIGHT]  48.24,63.32 90 top
R70  100k  [0402-TIGHT]  32.97,54.14 0 bottom
R71  100k  [0402-TIGHT]  55.47,53.15 180 bottom
R72  100k  [0402-TIGHT]  66.05,62.47 0 bottom
R73  1k  [0402-TIGHT]  54.19,52.62 0 top
R74  22  [0402-TIGHT]  53.87,57.38 0 top
R75  22  [0402-TIGHT]  53.87,56.46 0 top
R76  5.1k  [0402-TIGHT]  70.74,63.32 90 top
R77  100k  [0402-TIGHT]  55.47,54.14 0 bottom
R78  100k  [0402-TIGHT]  77.98,53.15 180 bottom
R79  100k  [0402-TIGHT]  88.56,62.47 0 bottom
R80  1k  [0402-TIGHT]  76.7,52.62 0 top
R81  22  [0402-TIGHT]  76.38,57.38 0 top
R82  22  [0402-TIGHT]  76.38,56.46 0 top
R83  5.1k  [0402-TIGHT]  93.25,63.32 90 top
R84  100k  [0402-TIGHT]  77.98,54.14 0 bottom
R85  100k  [0402-TIGHT]  100.49,53.15 180 bottom
R86  100k  [0402-TIGHT]  111.07,62.47 0 bottom
R87  1k  [0402-TIGHT]  99.21,52.62 0 top
R88  22  [0402-TIGHT]  98.89,57.38 0 top
R89  22  [0402-TIGHT]  98.89,56.46 0 top
R90  5.1k  [0402-TIGHT]  115.76,63.32 90 top
R91  100k  [0402-TIGHT]  100.49,54.14 0 bottom
R92  100k  [0402-TIGHT]  123,53.15 180 bottom
R93  100k  [0402-TIGHT]  133.58,62.47 0 bottom
R94  1k  [0402-TIGHT]  121.72,52.62 0 top
R95  22  [0402-TIGHT]  121.4,57.38 0 top
R96  22  [0402-TIGHT]  121.4,56.46 0 top
R97  5.1k  [0402-TIGHT]  138.27,63.32 90 top
R98  100k  [0402-TIGHT]  123,54.14 0 bottom
R99  100k  [0402-TIGHT]  145.51,53.15 180 bottom
R100  100k  [0402-TIGHT]  156.09,62.47 0 bottom
R101  1k  [0402-TIGHT]  144.23,52.62 0 top
R102  22  [0402-TIGHT]  143.91,57.38 0 top
R103  22  [0402-TIGHT]  143.91,56.46 0 top
R104  5.1k  [0402-TIGHT]  160.78,63.32 90 top
R105  100k  [0402-TIGHT]  145.51,54.14 0 bottom
R106  100k  [0402-TIGHT]  168.01,53.15 180 bottom
R107  100k  [0402-TIGHT]  178.59,62.47 0 bottom
R108  1k  [0402-TIGHT]  166.73,52.62 0 top
R109  22  [0402-TIGHT]  166.41,57.38 0 top
R110  22  [0402-TIGHT]  166.41,56.46 0 top
R111  5.1k  [0402-TIGHT]  183.28,63.32 90 top
R112  100k  [0402-TIGHT]  168.01,54.14 0 bottom
U1  STM32F405RGT6  [TQFP64]  17.94,13.1 270 top
U2  STM32F405RGT6  [TQFP64]  40.44,13.1 270 top
U3  W25QXX128MBIT-6X5  [WSON-8-6X5]  17.06,14.02 180 bottom
U4  W25QXX128MBIT-6X5  [WSON-8-6X5]  39.56,14.02 180 bottom
U5  STM32F405RGT6  [TQFP64]  62.95,13.1 270 top
U6  W25QXX128MBIT-6X5  [WSON-8-6X5]  62.07,14.02 180 bottom
U7  STM32F405RGT6  [TQFP64]  85.46,13.1 270 top
U8  W25QXX128MBIT-6X5  [WSON-8-6X5]  84.58,14.02 180 bottom
U9  STM32F405RGT6  [TQFP64]  107.97,13.1 270 top
U10  W25QXX128MBIT-6X5  [WSON-8-6X5]  107.09,14.02 180 bottom
U11  STM32F405RGT6  [TQFP64]  130.48,13.1 270 top
U12  W25QXX128MBIT-6X5  [WSON-8-6X5]  129.6,14.02 180 bottom
U13  STM32F405RGT6  [TQFP64]  152.99,13.1 270 top
U14  W25QXX128MBIT-6X5  [WSON-8-6X5]  152.11,14.02 180 bottom
U15  STM32F405RGT6  [TQFP64]  175.49,13.1 270 top
U16  W25QXX128MBIT-6X5  [WSON-8-6X5]  174.61,14.02 180 bottom
U17  STM32F405RGT6  [TQFP64]  17.78,58.79 90 top
U18  W25QXX128MBIT-6X5  [WSON-8-6X5]  18.66,57.87 0 bottom
U19  STM32F405RGT6  [TQFP64]  40.29,58.79 90 top
U20  W25QXX128MBIT-6X5  [WSON-8-6X5]  41.17,57.87 0 bottom
U21  STM32F405RGT6  [TQFP64]  62.79,58.79 90 top
U22  W25QXX128MBIT-6X5  [WSON-8-6X5]  63.67,57.87 0 bottom
U23  STM32F405RGT6  [TQFP64]  85.3,58.79 90 top
U24  W25QXX128MBIT-6X5  [WSON-8-6X5]  86.18,57.87 0 bottom
U25  STM32F405RGT6  [TQFP64]  107.81,58.79 90 top
U26  W25QXX128MBIT-6X5  [WSON-8-6X5]  108.69,57.87 0 bottom
U27  STM32F405RGT6  [TQFP64]  130.32,58.79 90 top
U28  W25QXX128MBIT-6X5  [WSON-8-6X5]  131.2,57.87 0 bottom
U29  STM32F405RGT6  [TQFP64]  152.83,58.79 90 top
U30  W25QXX128MBIT-6X5  [WSON-8-6X5]  153.71,57.87 0 bottom
U31  STM32F405RGT6  [TQFP64]  175.33,58.79 90 top
U32  W25QXX128MBIT-6X5  [WSON-8-6X5]  176.21,57.87 0 bottom
U$1  [STAT0]  26.54,20.53 0 top
U$2  [STM320]  19.02,7.38 0 bottom
U$3  [MICROMOD_MI_LOGO_.35]  27.48,10.25 90 top
U$4  [STM32F4050]  25.12,13.01 90 top
U$5  [MICROMOD_LOGO_.3]  12.02,7.38 0 bottom
U$6  [SFE_LOGO_FLAME_.1]  27.18,12.97 90 top
U$7  [STAT0]  49.04,20.53 0 top
U$8  [STM320]  41.52,7.38 0 bottom
U$9  [MICROMOD_MI_LOGO_.35]  49.98,10.25 90 top
U$10  [STM32F4050]  47.62,13.01 90 top
U$11  [MICROMOD_LOGO_.3]  34.52,7.38 0 bottom
U$12  [SFE_LOGO_FLAME_.1]  49.68,12.97 90 top
U$13  [STAT0]  71.55,20.53 0 top
U$14  [STM320]  64.03,7.38 0 bottom
U$15  [MICROMOD_MI_LOGO_.35]  72.49,10.25 90 top
U$16  [STM32F4050]  70.13,13.01 90 top
U$17  [MICROMOD_LOGO_.3]  57.03,7.38 0 bottom
U$18  [SFE_LOGO_FLAME_.1]  72.19,12.97 90 top
U$19  [STAT0]  94.06,20.53 0 top
U$20  [STM320]  86.54,7.38 0 bottom
U$21  [MICROMOD_MI_LOGO_.35]  95,10.25 90 top
U$22  [STM32F4050]  92.64,13.01 90 top
U$23  [MICROMOD_LOGO_.3]  79.54,7.38 0 bottom
U$24  [SFE_LOGO_FLAME_.1]  94.7,12.97 90 top
U$25  [STAT0]  116.57,20.53 0 top
U$26  [STM320]  109.05,7.38 0 bottom
U$27  [MICROMOD_MI_LOGO_.35]  117.51,10.25 90 top
U$28  [STM32F4050]  115.15,13.01 90 top
U$29  [MICROMOD_LOGO_.3]  102.05,7.38 0 bottom
U$30  [SFE_LOGO_FLAME_.1]  117.21,12.97 90 top
U$31  [STAT0]  139.08,20.53 0 top
U$32  [STM320]  131.56,7.38 0 bottom
U$33  [MICROMOD_MI_LOGO_.35]  140.02,10.25 90 top
U$34  [STM32F4050]  137.66,13.01 90 top
U$35  [MICROMOD_LOGO_.3]  124.56,7.38 0 bottom
U$36  [SFE_LOGO_FLAME_.1]  139.72,12.97 90 top
U$37  [STAT0]  161.59,20.53 0 top
U$38  [STM320]  154.07,7.38 0 bottom
U$39  [MICROMOD_MI_LOGO_.35]  162.53,10.25 90 top
U$40  [STM32F4050]  160.17,13.01 90 top
U$41  [MICROMOD_LOGO_.3]  147.07,7.38 0 bottom
U$42  [SFE_LOGO_FLAME_.1]  162.23,12.97 90 top
U$43  [STAT0]  184.09,20.53 0 top
U$44  [STM320]  176.57,7.38 0 bottom
U$45  [MICROMOD_MI_LOGO_.35]  185.03,10.25 90 top
U$46  [STM32F4050]  182.67,13.01 90 top
U$47  [MICROMOD_LOGO_.3]  169.57,7.38 0 bottom
U$48  [SFE_LOGO_FLAME_.1]  184.73,12.97 90 top
U$49  [STAT0]  9.18,51.36 180 top
U$50  [STM320]  16.7,64.51 180 bottom
U$51  [MICROMOD_MI_LOGO_.35]  8.24,61.64 270 top
U$52  [STM32F4050]  10.6,58.88 270 top
U$53  [MICROMOD_LOGO_.3]  23.7,64.51 180 bottom
U$54  [SFE_LOGO_FLAME_.1]  8.54,58.92 270 top
U$55  [STAT0]  31.69,51.36 180 top
U$56  [STM320]  39.21,64.51 180 bottom
U$57  [MICROMOD_MI_LOGO_.35]  30.75,61.64 270 top
U$58  [STM32F4050]  33.11,58.88 270 top
U$59  [MICROMOD_LOGO_.3]  46.21,64.51 180 bottom
U$60  [SFE_LOGO_FLAME_.1]  31.05,58.92 270 top
U$61  [STAT0]  54.19,51.36 180 top
U$62  [STM320]  61.71,64.51 180 bottom
U$63  [MICROMOD_MI_LOGO_.35]  53.25,61.64 270 top
U$64  [STM32F4050]  55.61,58.88 270 top
U$65  [MICROMOD_LOGO_.3]  68.71,64.51 180 bottom
U$66  [SFE_LOGO_FLAME_.1]  53.55,58.92 270 top
U$67  [STAT0]  76.7,51.36 180 top
U$68  [STM320]  84.22,64.51 180 bottom
U$69  [MICROMOD_MI_LOGO_.35]  75.76,61.64 270 top
U$70  [STM32F4050]  78.12,58.88 270 top
U$71  [MICROMOD_LOGO_.3]  91.22,64.51 180 bottom
U$72  [SFE_LOGO_FLAME_.1]  76.06,58.92 270 top
U$73  [STAT0]  99.21,51.36 180 top
U$74  [STM320]  106.73,64.51 180 bottom
U$75  [MICROMOD_MI_LOGO_.35]  98.27,61.64 270 top
U$76  [STM32F4050]  100.63,58.88 270 top
U$77  [MICROMOD_LOGO_.3]  113.73,64.51 180 bottom
U$78  [SFE_LOGO_FLAME_.1]  98.57,58.92 270 top
U$79  [STAT0]  121.72,51.36 180 top
U$80  [STM320]  129.24,64.51 180 bottom
U$81  [MICROMOD_MI_LOGO_.35]  120.78,61.64 270 top
U$82  [STM32F4050]  123.14,58.88 270 top
U$83  [MICROMOD_LOGO_.3]  136.24,64.51 180 bottom
U$84  [SFE_LOGO_FLAME_.1]  121.08,58.92 270 top
U$85  [STAT0]  144.23,51.36 180 top
U$86  [STM320]  151.75,64.51 180 bottom
U$87  [MICROMOD_MI_LOGO_.35]  143.29,61.64 270 top
U$88  [STM32F4050]  145.65,58.88 270 top
U$89  [MICROMOD_LOGO_.3]  158.75,64.51 180 bottom
U$90  [SFE_LOGO_FLAME_.1]  143.59,58.92 270 top
U$91  [STAT0]  166.73,51.36 180 top
U$92  [STM320]  174.25,64.51 180 bottom
U$93  [MICROMOD_MI_LOGO_.35]  165.79,61.64 270 top
U$94  [STM32F4050]  168.15,58.88 270 top
U$95  [MICROMOD_LOGO_.3]  181.25,64.51 180 bottom
U$96  [SFE_LOGO_FLAME_.1]  166.09,58.92 270 top
Y1  12MHz  [CRYSTAL-SMD-5X3.2-4PAD]  8.88,12.68 270 top
Y2  32.768kHz  [CRYSTAL-SMD-3.2X1.5MM]  9.01,19.09 0 top
Y3  12MHz  [CRYSTAL-SMD-5X3.2-4PAD]  31.38,12.68 270 top
Y4  32.768kHz  [CRYSTAL-SMD-3.2X1.5MM]  31.51,19.09 0 top
Y5  12MHz  [CRYSTAL-SMD-5X3.2-4PAD]  53.89,12.68 270 top
Y6  32.768kHz  [CRYSTAL-SMD-3.2X1.5MM]  54.02,19.09 0 top
Y7  12MHz  [CRYSTAL-SMD-5X3.2-4PAD]  76.4,12.68 270 top
Y8  32.768kHz  [CRYSTAL-SMD-3.2X1.5MM]  76.53,19.09 0 top
Y9  12MHz  [CRYSTAL-SMD-5X3.2-4PAD]  98.91,12.68 270 top
Y10  32.768kHz  [CRYSTAL-SMD-3.2X1.5MM]  99.04,19.09 0 top
Y11  12MHz  [CRYSTAL-SMD-5X3.2-4PAD]  121.42,12.68 270 top
Y12  32.768kHz  [CRYSTAL-SMD-3.2X1.5MM]  121.55,19.09 0 top
Y13  12MHz  [CRYSTAL-SMD-5X3.2-4PAD]  143.93,12.68 270 top
Y14  32.768kHz  [CRYSTAL-SMD-3.2X1.5MM]  144.06,19.09 0 top
Y15  12MHz  [CRYSTAL-SMD-5X3.2-4PAD]  166.43,12.68 270 top
Y16  32.768kHz  [CRYSTAL-SMD-3.2X1.5MM]  166.56,19.09 0 top
Y17  12MHz  [CRYSTAL-SMD-5X3.2-4PAD]  26.84,59.21 90 top
Y18  32.768kHz  [CRYSTAL-SMD-3.2X1.5MM]  26.71,52.8 180 top
Y19  12MHz  [CRYSTAL-SMD-5X3.2-4PAD]  49.35,59.21 90 top
Y20  32.768kHz  [CRYSTAL-SMD-3.2X1.5MM]  49.22,52.8 180 top
Y21  12MHz  [CRYSTAL-SMD-5X3.2-4PAD]  71.85,59.21 90 top
Y22  32.768kHz  [CRYSTAL-SMD-3.2X1.5MM]  71.72,52.8 180 top
Y23  12MHz  [CRYSTAL-SMD-5X3.2-4PAD]  94.36,59.21 90 top
Y24  32.768kHz  [CRYSTAL-SMD-3.2X1.5MM]  94.23,52.8 180 top
Y25  12MHz  [CRYSTAL-SMD-5X3.2-4PAD]  116.87,59.21 90 top
Y26  32.768kHz  [CRYSTAL-SMD-3.2X1.5MM]  116.74,52.8 180 top
Y27  12MHz  [CRYSTAL-SMD-5X3.2-4PAD]  139.38,59.21 90 top
Y28  32.768kHz  [CRYSTAL-SMD-3.2X1.5MM]  139.25,52.8 180 top
Y29  12MHz  [CRYSTAL-SMD-5X3.2-4PAD]  161.89,59.21 90 top
Y30  32.768kHz  [CRYSTAL-SMD-3.2X1.5MM]  161.76,52.8 180 top
Y31  12MHz  [CRYSTAL-SMD-5X3.2-4PAD]  184.39,59.21 90 top
Y32  32.768kHz  [CRYSTAL-SMD-3.2X1.5MM]  184.26,52.8 180 top

## Library data of the parts
C1 C2 C7 C23 C31 C38 C46 C53 C61 C68 C76 C83 C91 C98 C106 C113 C121 C128 C136 C143 C151 C158 C166 C173 C181 C188 C196 C203 C211 C218 C226 C233 = SparkFun-Capacitors; PROD_ID: CAP-14674
C3 C4 C25 C26 C40 C41 C55 C56 C70 C71 C85 C86 C100 C101 C115 C116 C130 C131 C145 C146 C160 C161 C175 C176 C190 C191 C205 C206 C220 C221 C235 C236 = SparkFun-Capacitors; PROD_ID: CAP-13063
C5 C6 C27 C28 C42 C43 C57 C58 C72 C73 C87 C88 C102 C103 C117 C118 C132 C133 C147 C148 C162 C163 C177 C178 C192 C193 C207 C208 C222 C223 C237 C238 = SparkFun-Capacitors; PROD_ID: CAP-14232
C8 C29 C44 C59 C74 C89 C104 C119 C134 C149 C164 C179 C194 C209 C224 C239 = SparkFun-Capacitors; PROD_ID: CAP-15083; SPICEPREFIX: C
C9 C30 C45 C60 C75 C90 C105 C120 C135 C150 C165 C180 C195 C210 C225 C240 = SparkFun-Capacitors; PROD_ID: CAP-12417; SPICEPREFIX: C
C10 C16 C32 C47 C62 C77 C92 C107 C122 C137 C152 C167 C182 C197 C212 C227 = SparkFun-Capacitors; PROD_ID: CAP-14240; SPICEPREFIX: C
C11-C15 C17-C22 C24 C33-C37 C39 C48-C52 C54 C63-C67 C69 C78-C82 C84 C93-C97 C99 C108-C112 C114 C123-C127 C129 C138-C142 C144 C153-C157 C159 C168-C172 C174 C183-C187 C189 C198-C202 C204 C213-C217 C219 C228-C232 C234 = SparkFun-Capacitors; PROD_ID: CAP-15083
D1-D16 = SparkFun-LED; PROD_ID: DIO-08575
E$1-E$4 FD1-FD64 LOGO1-LOGO32 U$6 U$12 U$18 U$24 U$30 U$36 U$42 U$48 U$54 U$60 U$66 U$72 U$78 U$84 U$90 U$96 = SparkFun-Aesthetics
E$5 E$6 = SparkFun-Retired
J1-J16 U$3 U$5 U$9 U$11 U$15 U$17 U$21 U$23 U$27 U$29 U$33 U$35 U$39 U$41 U$45 U$47 U$51 U$53 U$57 U$59 U$63 U$65 U$69 U$71 U$75 U$77 U$81 U$83 U$87 U$89 U$93 U$95 = SparkFun-MicroMod
Q1-Q16 = SparkFun-DiscreteSemi; PROD_ID: TRAN-14388
R1 R5-R7 R11 R14-R16 R21-R23 R28-R30 R35-R37 R42-R44 R49-R51 R56-R58 R63-R65 R70-R72 R77-R79 R84-R86 R91-R93 R98-R100 R105-R107 R112 = SparkFun-Resistors; PROD_ID: RES-13495
R2 R3 R9 R10 R18 R19 R25 R26 R32 R33 R39 R40 R46 R47 R53 R54 R60 R61 R67 R68 R74 R75 R81 R82 R88 R89 R95 R96 R102 R103 R109 R110 = SparkFun-Resistors; PROD_ID: RES-12427
R4 R13 R20 R27 R34 R41 R48 R55 R62 R69 R76 R83 R90 R97 R104 R111 = SparkFun-Resistors; PROD_ID: RES-14340
R8 R12 R17 R24 R31 R38 R45 R52 R59 R66 R73 R80 R87 R94 R101 R108 = SparkFun-Resistors; PROD_ID: RES-14342
U1 U2 U5 U7 U9 U11 U13 U15 U17 U19 U21 U23 U25 U27 U29 U31 = SparkFun-IC-Microcontroller; PROD_ID: IC-11709
U3 U4 U6 U8 U10 U12 U14 U16 U18 U20 U22 U24 U26 U28 U30 U32 = SparkFun-MicroMod; PROD_ID: IC-15107
U$1 U$2 U$4 U$7 U$8 U$10 U$13 U$14 U$16 U$19 U$20 U$22 U$25 U$26 U$28 U$31 U$32 U$34 U$37 U$38 U$40 U$43 U$44 U$46 U$49 U$50 U$52 U$55 U$56 U$58 U$61 U$62 U$64 U$67 U$68 U$70 U$73 U$74 U$76 U$79 U$80 U$82 U$85 U$86 U$88 U$91 U$92 U$94 = output
Y1 Y3 Y5 Y7 Y9 Y11 Y13 Y15 Y17 Y19 Y21 Y23 Y25 Y27 Y29 Y31 = SparkFun-Clocks; PROD_ID: XTAL-08297
Y2 Y4 Y6 Y8 Y10 Y12 Y14 Y16 Y18 Y20 Y22 Y24 Y26 Y28 Y30 Y32 = SparkFun-Clocks; PROD_ID: XTAL-13062